# EAGLE board RTC-Module-Panel-v14 (EAGLE 6.5.0), part 1 of 2
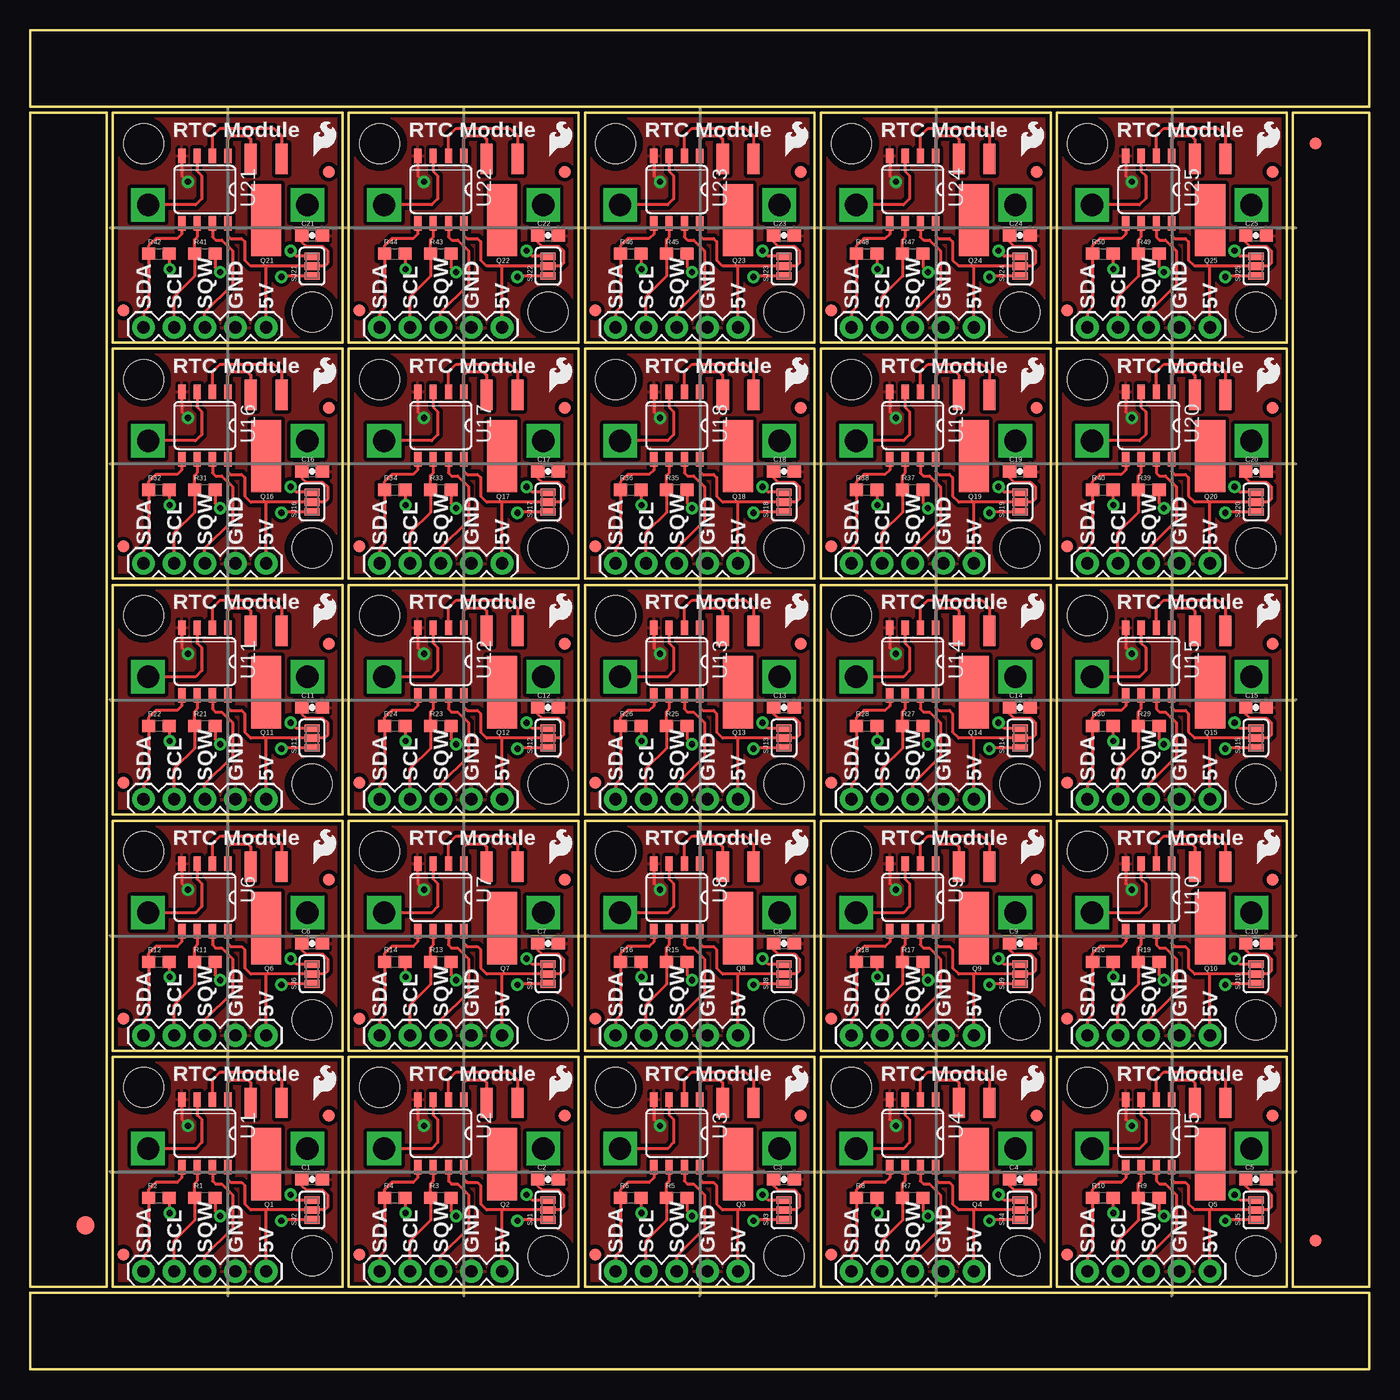
[diagram p0: board, top side]
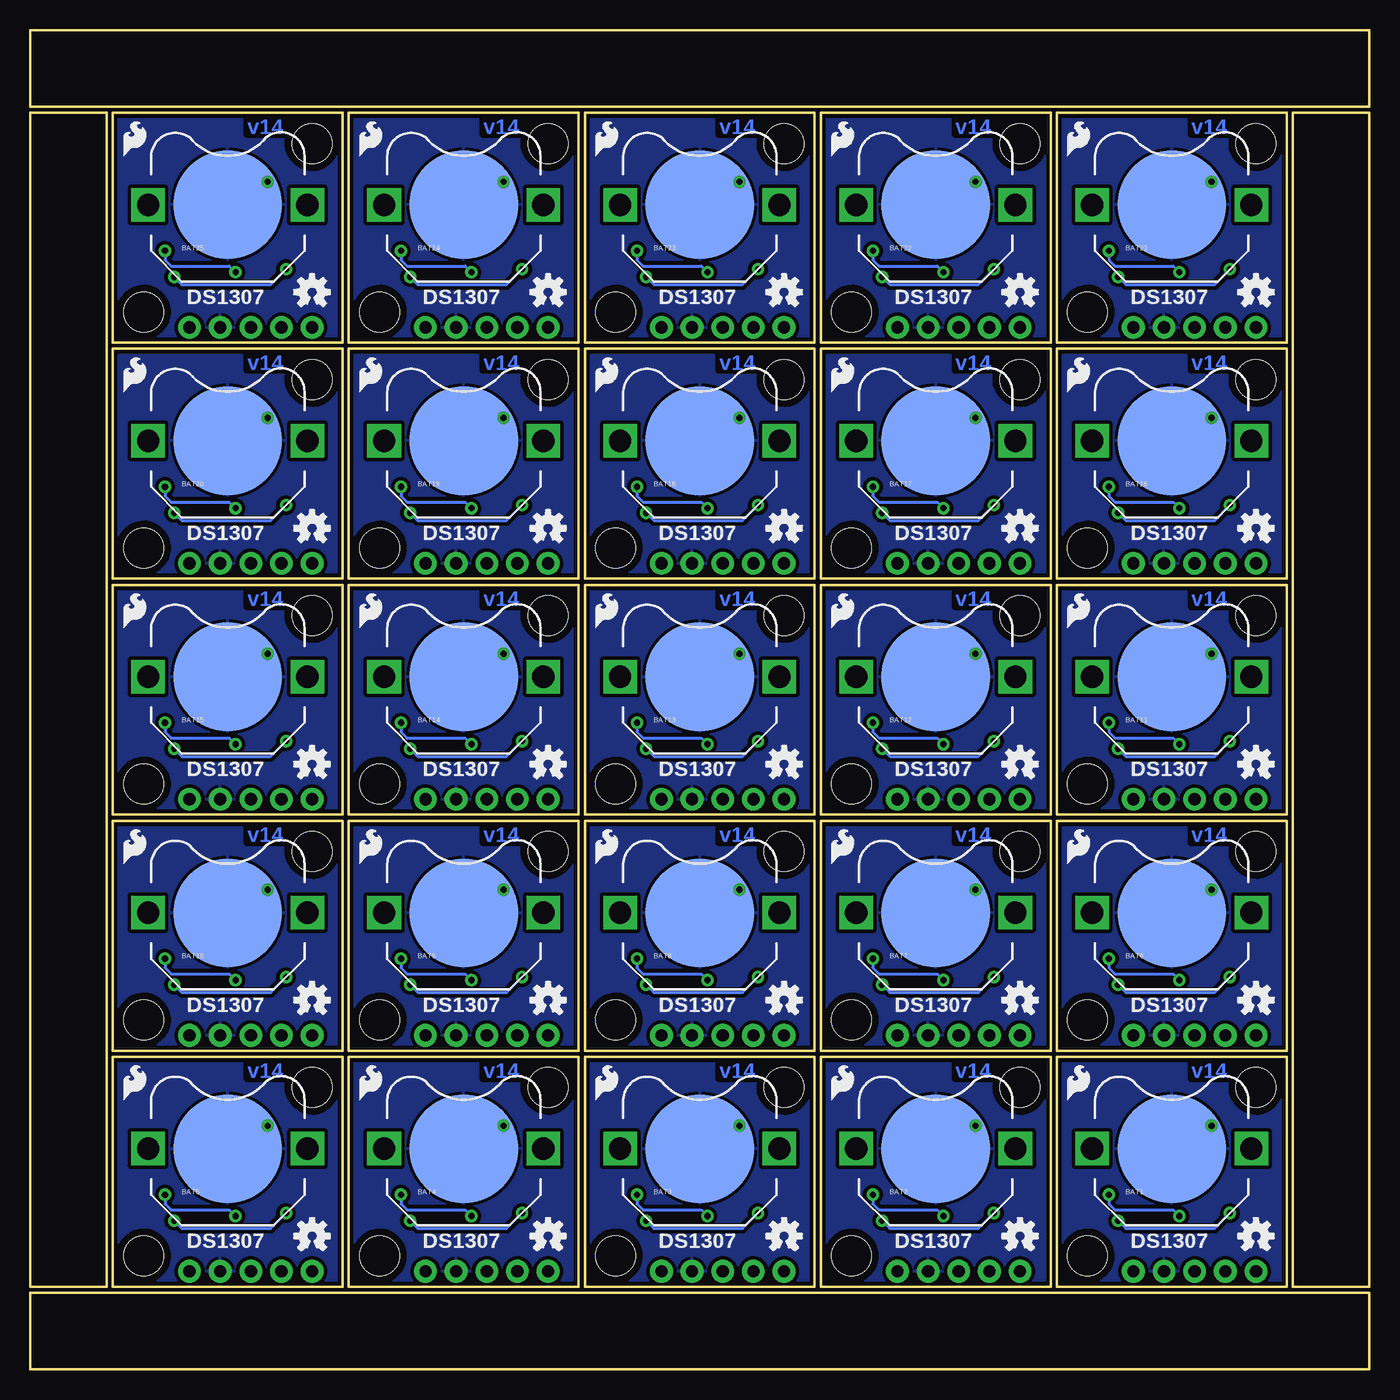
[diagram p1: board, bottom side, seen from below]

Size 111 x 111 mm. Coordinates in mm from the lower left corner, seen from the top.
Outline: 6.86,6.86 25.91,6.86 25.91,25.91 6.86,25.91 6.86,6.86
Outline: 26.42,6.86 45.47,6.86 45.47,25.91 26.42,25.91 26.42,6.86
Outline: 45.97,6.86 65.02,6.86 65.02,25.91 45.97,25.91 45.97,6.86
Outline: 65.53,6.86 84.58,6.86 84.58,25.91 65.53,25.91 65.53,6.86
Outline: 85.09,6.86 104.14,6.86 104.14,25.91 85.09,25.91 85.09,6.86
Outline: 6.86,26.42 25.91,26.42 25.91,45.47 6.86,45.47 6.86,26.42
Outline: 26.42,26.42 45.47,26.42 45.47,45.47 26.42,45.47 26.42,26.42
Outline: 45.97,26.42 65.02,26.42 65.02,45.47 45.97,45.47 45.97,26.42
Outline: 65.53,26.42 84.58,26.42 84.58,45.47 65.53,45.47 65.53,26.42
Outline: 85.09,26.42 104.14,26.42 104.14,45.47 85.09,45.47 85.09,26.42
Outline: 6.86,45.97 25.91,45.97 25.91,65.02 6.86,65.02 6.86,45.97
Outline: 26.42,45.97 45.47,45.97 45.47,65.02 26.42,65.02 26.42,45.97
Outline: 45.97,45.97 65.02,45.97 65.02,65.02 45.97,65.02 45.97,45.97
Outline: 65.53,45.97 84.58,45.97 84.58,65.02 65.53,65.02 65.53,45.97
Outline: 85.09,45.97 104.14,45.97 104.14,65.02 85.09,65.02 85.09,45.97
Outline: 6.86,65.53 25.91,65.53 25.91,84.58 6.86,84.58 6.86,65.53
Outline: 26.42,65.53 45.47,65.53 45.47,84.58 26.42,84.58 26.42,65.53
Outline: 45.97,65.53 65.02,65.53 65.02,84.58 45.97,84.58 45.97,65.53
Outline: 65.53,65.53 84.58,65.53 84.58,84.58 65.53,84.58 65.53,65.53
Outline: 85.09,65.53 104.14,65.53 104.14,84.58 85.09,84.58 85.09,65.53
Outline: 6.86,85.09 25.91,85.09 25.91,104.14 6.86,104.14 6.86,85.09
Outline: 26.42,85.09 45.47,85.09 45.47,104.14 26.42,104.14 26.42,85.09
Outline: 45.97,85.09 65.02,85.09 65.02,104.14 45.97,104.14 45.97,85.09
Outline: 65.53,85.09 84.58,85.09 84.58,104.14 65.53,104.14 65.53,85.09
Outline: 85.09,85.09 104.14,85.09 104.14,104.14 85.09,104.14 85.09,85.09
Outline: 6.35,6.86 6.35,104.14 0,104.14 0,6.86 6.35,6.86
Outline: 0,0 111,0 111,6.35 0,6.35 0,0
Outline: 111,6.86 111,104.14 104.65,104.14 104.65,6.86 111,6.86
Outline: 111,111 0,111 0,104.65 111,104.65 111,111
Copper layers (1*16): Top 0.035mm / dielectric 1.5mm / Bottom 0.035mm
Design rules "SparkFun-2-layer": minimum track width 7mil, minimum drill 15mil, track to track 8mil, track to pad 8mil, pad to pad 8mil, via to via 8mil, smd to smd 8mil, copper to edge 8mil, drill to drill 8mil, minimum pad ring 12mil, minimum via ring 10mil, stop-mask expansion 4mil, vias tented up to drill 20mil, thermal gap 10mil

## Footprints (pad centres in the part's own frame; a part is rotated, then mirrored left to right if it is on the bottom)
BATTCON_12MM_PTH = smd 9 x 9: GND 0,0 | drill 1.854 square: VCC@1 6.604,0; VCC@2 -6.604,0
0603-CAP = smd 1.1 x 1: 1 -0.85,0; 2 0.85,0
FIDUCIAL-1X2 = smd 1 x 1: 1 0,0
FIDUCIAL-1.5X3 = smd 1.5 x 1.5: 1 0,0
1X05 = drill 1.016 pad 1.88: 1 0,0; 2 2.54,0; 3 5.08,0; 4 7.62,0; 5 10.16,0
CRYSTAL-32KHZ-SMD = smd 2.5 x 6: SHEILD 0,5.08 | smd 1 x 2.5: X1 -1.27,0; X2 1.27,0
0603 = smd 1.1 x 1: 1 -0.85,0; 2 0.85,0
SJ_3_PASTE1&2&3 = smd 0.635 x 1.27: 1 -0.813,0; 2 0,0; 3 0.813,0
SO08-TIGHT = smd 0.6 x 1.2: 1 -1.905,-2.8; 2 -0.635,-2.8; 3 0.635,-2.8; 4 1.905,-2.8; 5 1.905,2.8; 6 0.635,2.8; 7 -0.635,2.8; 8 -1.905,2.8
STAND-OFF = hole 3.302: 0,0

## Placement (x,y rotation side)
BAT1  [BATTCON_12MM_PTH]  16.38,18.29 0 bottom
BAT2  [BATTCON_12MM_PTH]  35.94,18.29 0 bottom
BAT3  [BATTCON_12MM_PTH]  55.5,18.29 0 bottom
BAT4  [BATTCON_12MM_PTH]  75.06,18.29 0 bottom
BAT5  [BATTCON_12MM_PTH]  94.61,18.29 0 bottom
BAT6  [BATTCON_12MM_PTH]  16.38,37.85 0 bottom
BAT7  [BATTCON_12MM_PTH]  35.94,37.85 0 bottom
BAT8  [BATTCON_12MM_PTH]  55.5,37.85 0 bottom
BAT9  [BATTCON_12MM_PTH]  75.06,37.85 0 bottom
BAT10  [BATTCON_12MM_PTH]  94.61,37.85 0 bottom
BAT11  [BATTCON_12MM_PTH]  16.38,57.4 0 bottom
BAT12  [BATTCON_12MM_PTH]  35.94,57.4 0 bottom
BAT13  [BATTCON_12MM_PTH]  55.5,57.4 0 bottom
BAT14  [BATTCON_12MM_PTH]  75.06,57.4 0 bottom
BAT15  [BATTCON_12MM_PTH]  94.61,57.4 0 bottom
BAT16  [BATTCON_12MM_PTH]  16.38,76.96 0 bottom
BAT17  [BATTCON_12MM_PTH]  35.94,76.96 0 bottom
BAT18  [BATTCON_12MM_PTH]  55.5,76.96 0 bottom
BAT19  [BATTCON_12MM_PTH]  75.06,76.96 0 bottom
BAT20  [BATTCON_12MM_PTH]  94.61,76.96 0 bottom
BAT21  [BATTCON_12MM_PTH]  16.38,96.52 0 bottom
BAT22  [BATTCON_12MM_PTH]  35.94,96.52 0 bottom
BAT23  [BATTCON_12MM_PTH]  55.5,96.52 0 bottom
BAT24  [BATTCON_12MM_PTH]  75.06,96.52 0 bottom
BAT25  [BATTCON_12MM_PTH]  94.61,96.52 0 bottom
C1  0.1uF  [0603-CAP]  23.37,15.75 0 top
C2  0.1uF  [0603-CAP]  42.93,15.75 0 top
C3  0.1uF  [0603-CAP]  62.48,15.75 0 top
C4  0.1uF  [0603-CAP]  82.04,15.75 0 top
C5  0.1uF  [0603-CAP]  101.6,15.75 0 top
C6  0.1uF  [0603-CAP]  23.37,35.31 0 top
C7  0.1uF  [0603-CAP]  42.93,35.31 0 top
C8  0.1uF  [0603-CAP]  62.48,35.31 0 top
C9  0.1uF  [0603-CAP]  82.04,35.31 0 top
C10  0.1uF  [0603-CAP]  101.6,35.31 0 top
C11  0.1uF  [0603-CAP]  23.37,54.86 0 top
C12  0.1uF  [0603-CAP]  42.93,54.86 0 top
C13  0.1uF  [0603-CAP]  62.48,54.86 0 top
C14  0.1uF  [0603-CAP]  82.04,54.86 0 top
C15  0.1uF  [0603-CAP]  101.6,54.86 0 top
C16  0.1uF  [0603-CAP]  23.37,74.42 0 top
C17  0.1uF  [0603-CAP]  42.93,74.42 0 top
C18  0.1uF  [0603-CAP]  62.48,74.42 0 top
C19  0.1uF  [0603-CAP]  82.04,74.42 0 top
C20  0.1uF  [0603-CAP]  101.6,74.42 0 top
C21  0.1uF  [0603-CAP]  23.37,93.98 0 top
C22  0.1uF  [0603-CAP]  42.93,93.98 0 top
C23  0.1uF  [0603-CAP]  62.48,93.98 0 top
C24  0.1uF  [0603-CAP]  82.04,93.98 0 top
C25  0.1uF  [0603-CAP]  101.6,93.98 0 top
E$1  [FIDUCIAL-1X2]  7.72,9.53 0 top
E$2  [FIDUCIAL-1X2]  24.74,21.03 0 top
E$3  [FIDUCIAL-1X2]  27.28,9.53 0 top
E$4  [FIDUCIAL-1X2]  44.3,21.03 0 top
E$5  [FIDUCIAL-1X2]  46.84,9.53 0 top
E$6  [FIDUCIAL-1X2]  63.86,21.03 0 top
E$7  [FIDUCIAL-1X2]  66.4,9.53 0 top
E$8  [FIDUCIAL-1X2]  83.41,21.03 0 top
E$9  [FIDUCIAL-1X2]  85.95,9.53 0 top
E$10  [FIDUCIAL-1X2]  102.97,21.03 0 top
E$11  [FIDUCIAL-1X2]  7.72,29.08 0 top
E$12  [FIDUCIAL-1X2]  24.74,40.59 0 top
E$13  [FIDUCIAL-1X2]  27.28,29.08 0 top
E$14  [FIDUCIAL-1X2]  44.3,40.59 0 top
E$15  [FIDUCIAL-1X2]  46.84,29.08 0 top
E$16  [FIDUCIAL-1X2]  63.86,40.59 0 top
E$17  [FIDUCIAL-1X2]  66.4,29.08 0 top
E$18  [FIDUCIAL-1X2]  83.41,40.59 0 top
E$19  [FIDUCIAL-1X2]  85.95,29.08 0 top
E$20  [FIDUCIAL-1X2]  102.97,40.59 0 top
E$21  [FIDUCIAL-1X2]  7.72,48.64 0 top
E$22  [FIDUCIAL-1X2]  24.74,60.15 0 top
E$23  [FIDUCIAL-1X2]  27.28,48.64 0 top
E$24  [FIDUCIAL-1X2]  44.3,60.15 0 top
E$25  [FIDUCIAL-1X2]  46.84,48.64 0 top
E$26  [FIDUCIAL-1X2]  63.86,60.15 0 top
E$27  [FIDUCIAL-1X2]  66.4,48.64 0 top
E$28  [FIDUCIAL-1X2]  83.41,60.15 0 top
E$29  [FIDUCIAL-1X2]  85.95,48.64 0 top
E$30  [FIDUCIAL-1X2]  102.97,60.15 0 top
E$31  [FIDUCIAL-1X2]  7.72,68.2 0 top
E$32  [FIDUCIAL-1X2]  24.74,79.71 0 top
E$33  [FIDUCIAL-1X2]  27.28,68.2 0 top
E$34  [FIDUCIAL-1X2]  44.3,79.71 0 top
E$35  [FIDUCIAL-1X2]  46.84,68.2 0 top
E$36  [FIDUCIAL-1X2]  63.86,79.71 0 top
E$37  [FIDUCIAL-1X2]  66.4,68.2 0 top
E$38  [FIDUCIAL-1X2]  83.41,79.71 0 top
E$39  [FIDUCIAL-1X2]  85.95,68.2 0 top
E$40  [FIDUCIAL-1X2]  102.97,79.71 0 top
E$41  [FIDUCIAL-1X2]  7.72,87.76 0 top
E$42  [FIDUCIAL-1X2]  24.74,99.26 0 top
E$43  [FIDUCIAL-1X2]  27.28,87.76 0 top
E$44  [FIDUCIAL-1X2]  44.3,99.26 0 top
E$45  [FIDUCIAL-1X2]  46.84,87.76 0 top
E$46  [FIDUCIAL-1X2]  63.86,99.26 0 top
E$47  [FIDUCIAL-1X2]  66.4,87.76 0 top
E$48  [FIDUCIAL-1X2]  83.41,99.26 0 top
E$49  [FIDUCIAL-1X2]  85.95,87.76 0 top
E$50  [FIDUCIAL-1X2]  102.97,99.26 0 top
E$51  [FIDUCIAL-1.5X3]  4.57,11.94 0 top
E$54  [FIDUCIAL-1X2]  106.55,10.67 0 top
E$55  [FIDUCIAL-1X2]  106.55,101.6 180 top
JP1  [1X05]  19.56,8.13 180 top
JP2  [1X05]  39.12,8.13 180 top
JP3  [1X05]  58.67,8.13 180 top
JP4  [1X05]  78.23,8.13 180 top
JP5  [1X05]  97.79,8.13 180 top
JP6  [1X05]  19.56,27.69 180 top
JP7  [1X05]  39.12,27.69 180 top
JP8  [1X05]  58.67,27.69 180 top
JP9  [1X05]  78.23,27.69 180 top
JP10  [1X05]  97.79,27.69 180 top
JP11  [1X05]  19.56,47.24 180 top
JP12  [1X05]  39.12,47.24 180 top
JP13  [1X05]  58.67,47.24 180 top
JP14  [1X05]  78.23,47.24 180 top
JP15  [1X05]  97.79,47.24 180 top
JP16  [1X05]  19.56,66.8 180 top
JP17  [1X05]  39.12,66.8 180 top
JP18  [1X05]  58.67,66.8 180 top
JP19  [1X05]  78.23,66.8 180 top
JP20  [1X05]  97.79,66.8 180 top
JP21  [1X05]  19.56,86.36 180 top
JP22  [1X05]  39.12,86.36 180 top
JP23  [1X05]  58.67,86.36 180 top
JP24  [1X05]  78.23,86.36 180 top
JP25  [1X05]  97.79,86.36 180 top
LOGO1  OSHW-LOGOS  [OSHW-LOGO-S]  9.4,11.05 0 bottom
LOGO2  OSHW-LOGOS  [OSHW-LOGO-S]  28.96,11.05 0 bottom
LOGO3  OSHW-LOGOS  [OSHW-LOGO-S]  48.51,11.05 0 bottom
LOGO4  OSHW-LOGOS  [OSHW-LOGO-S]  68.07,11.05 0 bottom
LOGO5  OSHW-LOGOS  [OSHW-LOGO-S]  87.63,11.05 0 bottom
LOGO6  OSHW-LOGOS  [OSHW-LOGO-S]  9.4,30.61 0 bottom
LOGO7  OSHW-LOGOS  [OSHW-LOGO-S]  28.96,30.61 0 bottom
LOGO8  OSHW-LOGOS  [OSHW-LOGO-S]  48.51,30.61 0 bottom
LOGO9  OSHW-LOGOS  [OSHW-LOGO-S]  68.07,30.61 0 bottom
LOGO10  OSHW-LOGOS  [OSHW-LOGO-S]  87.63,30.61 0 bottom
LOGO11  OSHW-LOGOS  [OSHW-LOGO-S]  9.4,50.16 0 bottom
LOGO12  OSHW-LOGOS  [OSHW-LOGO-S]  28.96,50.16 0 bottom
LOGO13  OSHW-LOGOS  [OSHW-LOGO-S]  48.51,50.16 0 bottom
LOGO14  OSHW-LOGOS  [OSHW-LOGO-S]  68.07,50.16 0 bottom
LOGO15  OSHW-LOGOS  [OSHW-LOGO-S]  87.63,50.16 0 bottom
LOGO16  OSHW-LOGOS  [OSHW-LOGO-S]  9.4,69.72 0 bottom
LOGO17  OSHW-LOGOS  [OSHW-LOGO-S]  28.96,69.72 0 bottom
LOGO18  OSHW-LOGOS  [OSHW-LOGO-S]  48.51,69.72 0 bottom
LOGO19  OSHW-LOGOS  [OSHW-LOGO-S]  68.07,69.72 0 bottom
LOGO20  OSHW-LOGOS  [OSHW-LOGO-S]  87.63,69.72 0 bottom
LOGO21  OSHW-LOGOS  [OSHW-LOGO-S]  9.4,89.28 0 bottom
LOGO22  OSHW-LOGOS  [OSHW-LOGO-S]  28.96,89.28 0 bottom
LOGO23  OSHW-LOGOS  [OSHW-LOGO-S]  48.51,89.28 0 bottom
LOGO24  OSHW-LOGOS  [OSHW-LOGO-S]  68.07,89.28 0 bottom
LOGO25  OSHW-LOGOS  [OSHW-LOGO-S]  87.63,89.28 0 bottom
Q1  32.768kHz  [CRYSTAL-32KHZ-SMD]  19.56,22.1 180 top
Q2  32.768kHz  [CRYSTAL-32KHZ-SMD]  39.12,22.1 180 top
Q3  32.768kHz  [CRYSTAL-32KHZ-SMD]  58.67,22.1 180 top
Q4  32.768kHz  [CRYSTAL-32KHZ-SMD]  78.23,22.1 180 top
Q5  32.768kHz  [CRYSTAL-32KHZ-SMD]  97.79,22.1 180 top
Q6  32.768kHz  [CRYSTAL-32KHZ-SMD]  19.56,41.66 180 top
Q7  32.768kHz  [CRYSTAL-32KHZ-SMD]  39.12,41.66 180 top
Q8  32.768kHz  [CRYSTAL-32KHZ-SMD]  58.67,41.66 180 top
Q9  32.768kHz  [CRYSTAL-32KHZ-SMD]  78.23,41.66 180 top
Q10  32.768kHz  [CRYSTAL-32KHZ-SMD]  97.79,41.66 180 top
Q11  32.768kHz  [CRYSTAL-32KHZ-SMD]  19.56,61.21 180 top
Q12  32.768kHz  [CRYSTAL-32KHZ-SMD]  39.12,61.21 180 top
Q13  32.768kHz  [CRYSTAL-32KHZ-SMD]  58.67,61.21 180 top
Q14  32.768kHz  [CRYSTAL-32KHZ-SMD]  78.23,61.21 180 top
Q15  32.768kHz  [CRYSTAL-32KHZ-SMD]  97.79,61.21 180 top
Q16  32.768kHz  [CRYSTAL-32KHZ-SMD]  19.56,80.77 180 top
Q17  32.768kHz  [CRYSTAL-32KHZ-SMD]  39.12,80.77 180 top
Q18  32.768kHz  [CRYSTAL-32KHZ-SMD]  58.67,80.77 180 top
Q19  32.768kHz  [CRYSTAL-32KHZ-SMD]  78.23,80.77 180 top
Q20  32.768kHz  [CRYSTAL-32KHZ-SMD]  97.79,80.77 180 top
Q21  32.768kHz  [CRYSTAL-32KHZ-SMD]  19.56,100.33 180 top
Q22  32.768kHz  [CRYSTAL-32KHZ-SMD]  39.12,100.33 180 top
Q23  32.768kHz  [CRYSTAL-32KHZ-SMD]  58.67,100.33 180 top
Q24  32.768kHz  [CRYSTAL-32KHZ-SMD]  78.23,100.33 180 top
Q25  32.768kHz  [CRYSTAL-32KHZ-SMD]  97.79,100.33 180 top
R1  4.7k  [0603]  14.48,14.22 0 top
R2  4.7k  [0603]  10.67,14.22 0 top
R3  4.7k  [0603]  34.04,14.22 0 top
R4  4.7k  [0603]  30.23,14.22 0 top
R5  4.7k  [0603]  53.59,14.22 0 top
R6  4.7k  [0603]  49.78,14.22 0 top
R7  4.7k  [0603]  73.15,14.22 0 top
R8  4.7k  [0603]  69.34,14.22 0 top
R9  4.7k  [0603]  92.71,14.22 0 top
R10  4.7k  [0603]  88.9,14.22 0 top
R11  4.7k  [0603]  14.48,33.78 0 top
R12  4.7k  [0603]  10.67,33.78 0 top
R13  4.7k  [0603]  34.04,33.78 0 top
R14  4.7k  [0603]  30.23,33.78 0 top
R15  4.7k  [0603]  53.59,33.78 0 top
R16  4.7k  [0603]  49.78,33.78 0 top
R17  4.7k  [0603]  73.15,33.78 0 top
R18  4.7k  [0603]  69.34,33.78 0 top
R19  4.7k  [0603]  92.71,33.78 0 top
R20  4.7k  [0603]  88.9,33.78 0 top
R21  4.7k  [0603]  14.48,53.34 0 top
R22  4.7k  [0603]  10.67,53.34 0 top
R23  4.7k  [0603]  34.04,53.34 0 top
R24  4.7k  [0603]  30.23,53.34 0 top
R25  4.7k  [0603]  53.59,53.34 0 top
R26  4.7k  [0603]  49.78,53.34 0 top
R27  4.7k  [0603]  73.15,53.34 0 top
R28  4.7k  [0603]  69.34,53.34 0 top
R29  4.7k  [0603]  92.71,53.34 0 top
R30  4.7k  [0603]  88.9,53.34 0 top
R31  4.7k  [0603]  14.48,72.9 0 top
R32  4.7k  [0603]  10.67,72.9 0 top
R33  4.7k  [0603]  34.04,72.9 0 top
R34  4.7k  [0603]  30.23,72.9 0 top
R35  4.7k  [0603]  53.59,72.9 0 top
R36  4.7k  [0603]  49.78,72.9 0 top
R37  4.7k  [0603]  73.15,72.9 0 top
R38  4.7k  [0603]  69.34,72.9 0 top
R39  4.7k  [0603]  92.71,72.9 0 top
R40  4.7k  [0603]  88.9,72.9 0 top
R41  4.7k  [0603]  14.48,92.46 0 top
R42  4.7k  [0603]  10.67,92.46 0 top
R43  4.7k  [0603]  34.04,92.46 0 top
R44  4.7k  [0603]  30.23,92.46 0 top
R45  4.7k  [0603]  53.59,92.46 0 top
R46  4.7k  [0603]  49.78,92.46 0 top
R47  4.7k  [0603]  73.15,92.46 0 top
R48  4.7k  [0603]  69.34,92.46 0 top
R49  4.7k  [0603]  92.71,92.46 0 top
R50  4.7k  [0603]  88.9,92.46 0 top
SJ1  [SJ_3_PASTE1&2&3]  42.93,13.21 90 top
SJ2  [SJ_3_PASTE1&2&3]  23.37,13.21 90 top
SJ3  [SJ_3_PASTE1&2&3]  62.48,13.21 90 top
SJ4  [SJ_3_PASTE1&2&3]  82.04,13.21 90 top
SJ5  [SJ_3_PASTE1&2&3]  101.6,13.21 90 top
SJ6  [SJ_3_PASTE1&2&3]  23.37,32.77 90 top
SJ7  [SJ_3_PASTE1&2&3]  42.93,32.77 90 top
SJ8  [SJ_3_PASTE1&2&3]  62.48,32.77 90 top
SJ9  [SJ_3_PASTE1&2&3]  82.04,32.77 90 top
SJ10  [SJ_3_PASTE1&2&3]  101.6,32.77 90 top
SJ11  [SJ_3_PASTE1&2&3]  23.37,52.32 90 top
SJ12  [SJ_3_PASTE1&2&3]  42.93,52.32 90 top
SJ13  [SJ_3_PASTE1&2&3]  62.48,52.32 90 top
SJ14  [SJ_3_PASTE1&2&3]  82.04,52.32 90 top
SJ15  [SJ_3_PASTE1&2&3]  101.6,52.32 90 top
SJ16  [SJ_3_PASTE1&2&3]  23.37,71.88 90 top
SJ17  [SJ_3_PASTE1&2&3]  42.93,71.88 90 top
SJ18  [SJ_3_PASTE1&2&3]  62.48,71.88 90 top
SJ19  [SJ_3_PASTE1&2&3]  82.04,71.88 90 top
SJ20  [SJ_3_PASTE1&2&3]  101.6,71.88 90 top
SJ21  [SJ_3_PASTE1&2&3]  23.37,91.44 90 top
SJ22  [SJ_3_PASTE1&2&3]  42.93,91.44 90 top
SJ23  [SJ_3_PASTE1&2&3]  62.48,91.44 90 top
SJ24  [SJ_3_PASTE1&2&3]  82.04,91.44 90 top
SJ25  [SJ_3_PASTE1&2&3]  101.6,91.44 90 top
U1  DS1307  [SO08-TIGHT]  14.48,19.56 180 top
U2  DS1307  [SO08-TIGHT]  34.04,19.56 180 top
U3  DS1307  [SO08-TIGHT]  53.59,19.56 180 top
U4  DS1307  [SO08-TIGHT]  73.15,19.56 180 top
U5  DS1307  [SO08-TIGHT]  92.71,19.56 180 top
U6  DS1307  [SO08-TIGHT]  14.48,39.12 180 top
U7  DS1307  [SO08-TIGHT]  34.04,39.12 180 top
U8  DS1307  [SO08-TIGHT]  53.59,39.12 180 top
U9  DS1307  [SO08-TIGHT]  73.15,39.12 180 top
U10  DS1307  [SO08-TIGHT]  92.71,39.12 180 top
U11  DS1307  [SO08-TIGHT]  14.48,58.67 180 top
U12  DS1307  [SO08-TIGHT]  34.04,58.67 180 top
U13  DS1307  [SO08-TIGHT]  53.59,58.67 180 top
U14  DS1307  [SO08-TIGHT]  73.15,58.67 180 top
U15  DS1307  [SO08-TIGHT]  92.71,58.67 180 top
U16  DS1307  [SO08-TIGHT]  14.48,78.23 180 top
U17  DS1307  [SO08-TIGHT]  34.04,78.23 180 top
U18  DS1307  [SO08-TIGHT]  53.59,78.23 180 top
U19  DS1307  [SO08-TIGHT]  73.15,78.23 180 top
U20  DS1307  [SO08-TIGHT]  92.71,78.23 180 top
U21  DS1307  [SO08-TIGHT]  14.48,97.79 180 top
U22  DS1307  [SO08-TIGHT]  34.04,97.79 180 top
U23  DS1307  [SO08-TIGHT]  53.59,97.79 180 top
U24  DS1307  [SO08-TIGHT]  73.15,97.79 180 top
U25  DS1307  [SO08-TIGHT]  92.71,97.79 180 top
U$1  LOGO-SFESK  [SFE-LOGO-FLAME]  23.5,22.35 0 top
U$2  LOGO-SFESK  [SFE-LOGO-FLAME]  25.02,22.35 0 bottom
U$3  LOGO-SFESK  [SFE-LOGO-FLAME]  43.05,22.35 0 top
U$4  STAND-OFF  [STAND-OFF]  42.93,9.4 0 top
U$5  STAND-OFF  [STAND-OFF]  28.96,23.37 0 top
U$6  STAND-OFF  [STAND-OFF]  23.37,9.4 0 top
U$7  STAND-OFF  [STAND-OFF]  9.4,23.37 0 top
U$8  LOGO-SFESK  [SFE-LOGO-FLAME]  44.58,22.35 0 bottom
U$9  LOGO-SFESK  [SFE-LOGO-FLAME]  62.61,22.35 0 top
U$10  STAND-OFF  [STAND-OFF]  62.48,9.4 0 top
U$11  STAND-OFF  [STAND-OFF]  48.51,23.37 0 top
U$12  LOGO-SFESK  [SFE-LOGO-FLAME]  64.14,22.35 0 bottom
U$13  LOGO-SFESK  [SFE-LOGO-FLAME]  82.17,22.35 0 top
U$14  STAND-OFF  [STAND-OFF]  82.04,9.4 0 top
U$15  STAND-OFF  [STAND-OFF]  68.07,23.37 0 top
U$16  LOGO-SFESK  [SFE-LOGO-FLAME]  83.69,22.35 0 bottom
U$17  LOGO-SFESK  [SFE-LOGO-FLAME]  101.73,22.35 0 top
U$18  STAND-OFF  [STAND-OFF]  101.6,9.4 0 top
U$19  STAND-OFF  [STAND-OFF]  87.63,23.37 0 top
U$20  LOGO-SFESK  [SFE-LOGO-FLAME]  103.25,22.35 0 bottom
U$21  LOGO-SFESK  [SFE-LOGO-FLAME]  23.5,41.91 0 top
U$22  STAND-OFF  [STAND-OFF]  23.37,28.96 0 top
U$23  STAND-OFF  [STAND-OFF]  9.4,42.93 0 top
U$24  LOGO-SFESK  [SFE-LOGO-FLAME]  25.02,41.91 0 bottom
U$25  LOGO-SFESK  [SFE-LOGO-FLAME]  43.05,41.91 0 top
U$26  STAND-OFF  [STAND-OFF]  42.93,28.96 0 top
U$27  STAND-OFF  [STAND-OFF]  28.96,42.93 0 top
U$28  LOGO-SFESK  [SFE-LOGO-FLAME]  44.58,41.91 0 bottom
U$29  LOGO-SFESK  [SFE-LOGO-FLAME]  62.61,41.91 0 top
U$30  STAND-OFF  [STAND-OFF]  62.48,28.96 0 top
U$31  STAND-OFF  [STAND-OFF]  48.51,42.93 0 top
U$32  LOGO-SFESK  [SFE-LOGO-FLAME]  64.14,41.91 0 bottom
U$33  LOGO-SFESK  [SFE-LOGO-FLAME]  82.17,41.91 0 top
U$34  STAND-OFF  [STAND-OFF]  82.04,28.96 0 top
U$35  STAND-OFF  [STAND-OFF]  68.07,42.93 0 top
U$36  LOGO-SFESK  [SFE-LOGO-FLAME]  83.69,41.91 0 bottom
U$37  LOGO-SFESK  [SFE-LOGO-FLAME]  101.73,41.91 0 top
U$38  STAND-OFF  [STAND-OFF]  101.6,28.96 0 top
U$39  STAND-OFF  [STAND-OFF]  87.63,42.93 0 top
U$40  LOGO-SFESK  [SFE-LOGO-FLAME]  103.25,41.91 0 bottom
U$41  LOGO-SFESK  [SFE-LOGO-FLAME]  23.5,61.47 0 top
U$42  STAND-OFF  [STAND-OFF]  23.37,48.51 0 top
U$43  STAND-OFF  [STAND-OFF]  9.4,62.48 0 top
U$44  LOGO-SFESK  [SFE-LOGO-FLAME]  25.02,61.47 0 bottom
U$45  LOGO-SFESK  [SFE-LOGO-FLAME]  43.05,61.47 0 top
U$46  STAND-OFF  [STAND-OFF]  42.93,48.51 0 top
U$47  STAND-OFF  [STAND-OFF]  28.96,62.48 0 top
U$48  LOGO-SFESK  [SFE-LOGO-FLAME]  44.58,61.47 0 bottom
U$49  LOGO-SFESK  [SFE-LOGO-FLAME]  62.61,61.47 0 top
U$50  STAND-OFF  [STAND-OFF]  62.48,48.51 0 top
U$51  STAND-OFF  [STAND-OFF]  48.51,62.48 0 top
U$52  LOGO-SFESK  [SFE-LOGO-FLAME]  64.14,61.47 0 bottom
U$53  LOGO-SFESK  [SFE-LOGO-FLAME]  82.17,61.47 0 top
U$54  STAND-OFF  [STAND-OFF]  82.04,48.51 0 top
U$55  STAND-OFF  [STAND-OFF]  68.07,62.48 0 top
U$56  LOGO-SFESK  [SFE-LOGO-FLAME]  83.69,61.47 0 bottom
U$57  LOGO-SFESK  [SFE-LOGO-FLAME]  101.73,61.47 0 top
U$58  STAND-OFF  [STAND-OFF]  101.6,48.51 0 top
U$59  STAND-OFF  [STAND-OFF]  87.63,62.48 0 top
U$60  LOGO-SFESK  [SFE-LOGO-FLAME]  103.25,61.47 0 bottom
U$61  LOGO-SFESK  [SFE-LOGO-FLAME]  23.5,81.03 0 top
U$62  STAND-OFF  [STAND-OFF]  23.37,68.07 0 top
U$63  STAND-OFF  [STAND-OFF]  9.4,82.04 0 top
U$64  LOGO-SFESK  [SFE-LOGO-FLAME]  25.02,81.03 0 bottom
U$65  LOGO-SFESK  [SFE-LOGO-FLAME]  43.05,81.03 0 top
U$66  STAND-OFF  [STAND-OFF]  42.93,68.07 0 top
U$67  STAND-OFF  [STAND-OFF]  28.96,82.04 0 top
U$68  LOGO-SFESK  [SFE-LOGO-FLAME]  44.58,81.03 0 bottom
U$69  LOGO-SFESK  [SFE-LOGO-FLAME]  62.61,81.03 0 top
U$70  STAND-OFF  [STAND-OFF]  62.48,68.07 0 top
U$71  STAND-OFF  [STAND-OFF]  48.51,82.04 0 top
U$72  LOGO-SFESK  [SFE-LOGO-FLAME]  64.14,81.03 0 bottom
U$73  LOGO-SFESK  [SFE-LOGO-FLAME]  82.17,81.03 0 top
U$74  STAND-OFF  [STAND-OFF]  82.04,68.07 0 top
U$75  STAND-OFF  [STAND-OFF]  68.07,82.04 0 top
U$76  LOGO-SFESK  [SFE-LOGO-FLAME]  83.69,81.03 0 bottom
U$77  LOGO-SFESK  [SFE-LOGO-FLAME]  101.73,81.03 0 top
U$78  STAND-OFF  [STAND-OFF]  101.6,68.07 0 top
U$79  STAND-OFF  [STAND-OFF]  87.63,82.04 0 top
U$80  LOGO-SFESK  [SFE-LOGO-FLAME]  103.25,81.03 0 bottom
U$81  LOGO-SFESK  [SFE-LOGO-FLAME]  23.5,100.58 0 top
U$82  STAND-OFF  [STAND-OFF]  23.37,87.63 0 top
U$83  STAND-OFF  [STAND-OFF]  9.4,101.6 0 top
U$84  LOGO-SFESK  [SFE-LOGO-FLAME]  25.02,100.58 0 bottom
U$85  LOGO-SFESK  [SFE-LOGO-FLAME]  43.05,100.58 0 top
U$86  STAND-OFF  [STAND-OFF]  42.93,87.63 0 top
U$87  STAND-OFF  [STAND-OFF]  28.96,101.6 0 top
U$88  LOGO-SFESK  [SFE-LOGO-FLAME]  44.58,100.58 0 bottom
U$89  LOGO-SFESK  [SFE-LOGO-FLAME]  62.61,100.58 0 top
U$90  STAND-OFF  [STAND-OFF]  62.48,87.63 0 top
U$91  STAND-OFF  [STAND-OFF]  48.51,101.6 0 top
U$92  LOGO-SFESK  [SFE-LOGO-FLAME]  64.14,100.58 0 bottom
U$93  LOGO-SFESK  [SFE-LOGO-FLAME]  82.17,100.58 0 top
U$94  STAND-OFF  [STAND-OFF]  82.04,87.63 0 top
U$95  STAND-OFF  [STAND-OFF]  68.07,101.6 0 top
U$96  LOGO-SFESK  [SFE-LOGO-FLAME]  83.69,100.58 0 bottom
U$97  LOGO-SFESK  [SFE-LOGO-FLAME]  101.73,100.58 0 top
U$98  STAND-OFF  [STAND-OFF]  101.6,87.63 0 top
U$99  STAND-OFF  [STAND-OFF]  87.63,101.6 0 top
U$100  LOGO-SFESK  [SFE-LOGO-FLAME]  103.25,100.58 0 bottom

## Library data of the parts
BAT1-BAT25 = SparkFun-Electromechanical
C1-C25 = SparkFun-Capacitors; PROD_ID: CAP-00810
E$1-E$50 JP1-JP25 U$1-U$100 = SparkFun
E$51 E$54 E$55 LOGO1-LOGO25 = SparkFun-Aesthetics
Q1-Q25 U1-U25 = SparkFun-FreqCtrl
R1-R50 = SparkFun-Resistors; PROD_ID: RES-07857
SJ1-SJ25 = SparkFun-Passives

## Nets
5V: C1.1 JP1.1 SJ2.2 U1.8
5V1: C2.1 JP2.1 SJ1.2 U2.8
5V2: C3.1 JP3.1 SJ3.2 U3.8
5V3: C4.1 JP4.1 SJ4.2 U4.8
5V4: C5.1 JP5.1 SJ5.2 U5.8
5V5: C6.1 JP6.1 SJ6.2 U6.8
5V6: C7.1 JP7.1 SJ7.2 U7.8
5V7: C8.1 JP8.1 SJ8.2 U8.8
5V8: C9.1 JP9.1 SJ9.2 U9.8
5V9: C10.1 JP10.1 SJ10.2 U10.8
5V10: C11.1 JP11.1 SJ11.2 U11.8
5V11: C12.1 JP12.1 SJ12.2 U12.8
5V12: C13.1 JP13.1 SJ13.2 U13.8
5V13: C14.1 JP14.1 SJ14.2 U14.8
5V14: C15.1 JP15.1 SJ15.2 U15.8
5V15: C16.1 JP16.1 SJ16.2 U16.8
5V16: C17.1 JP17.1 SJ17.2 U17.8
5V17: C18.1 JP18.1 SJ18.2 U18.8
5V18: C19.1 JP19.1 SJ19.2 U19.8
5V19: C20.1 JP20.1 SJ20.2 U20.8
5V20: C21.1 JP21.1 SJ21.2 U21.8
5V21: C22.1 JP22.1 SJ22.2 U22.8
5V22: C23.1 JP23.1 SJ23.2 U23.8
5V23: C24.1 JP24.1 SJ24.2 U24.8
5V24: C25.1 JP25.1 SJ25.2 U25.8
GND: BAT1.GND C1.2 JP1.2 U1.4
GND1: BAT2.GND C2.2 JP2.2 U2.4
GND2: BAT3.GND C3.2 JP3.2 U3.4
GND3: BAT4.GND C4.2 JP4.2 U4.4
GND4: BAT5.GND C5.2 JP5.2 U5.4
GND5: BAT6.GND C6.2 JP6.2 U6.4
GND6: BAT7.GND C7.2 JP7.2 U7.4
GND7: BAT8.GND C8.2 JP8.2 U8.4
GND8: BAT9.GND C9.2 JP9.2 U9.4
GND9: BAT10.GND C10.2 JP10.2 U10.4
GND10: BAT11.GND C11.2 JP11.2 U11.4
GND11: BAT12.GND C12.2 JP12.2 U12.4
GND12: BAT13.GND C13.2 JP13.2 U13.4
GND13: BAT14.GND C14.2 JP14.2 U14.4
GND14: BAT15.GND C15.2 JP15.2 U15.4
GND15: BAT16.GND C16.2 JP16.2 U16.4
GND16: BAT17.GND C17.2 JP17.2 U17.4
GND17: BAT18.GND C18.2 JP18.2 U18.4
GND18: BAT19.GND C19.2 JP19.2 U19.4
GND19: BAT20.GND C20.2 JP20.2 U20.4
GND20: BAT21.GND C21.2 JP21.2 U21.4
GND21: BAT22.GND C22.2 JP22.2 U22.4
GND22: BAT23.GND C23.2 JP23.2 U23.4
GND23: BAT24.GND C24.2 JP24.2 U24.4
GND24: BAT25.GND C25.2 JP25.2 U25.4
N$1: Q1.X2 U1.1
N$2: Q1.X1 U1.2
N$3: Q2.X2 U2.1
N$4: BAT1.VCC@1 U1.3
N$5: R1.2 SJ2.3
N$6: R2.2 SJ2.1
N$7: Q2.X1 U2.2
N$8: BAT2.VCC@1 U2.3
N$9: R3.2 SJ1.3
N$10: R4.2 SJ1.1
N$11: Q3.X2 U3.1
N$12: Q3.X1 U3.2
N$13: BAT3.VCC@1 U3.3
N$14: R5.2 SJ3.3
N$15: R6.2 SJ3.1
N$16: Q4.X2 U4.1
N$17: Q4.X1 U4.2
N$18: BAT4.VCC@1 U4.3
N$19: R7.2 SJ4.3
N$20: R8.2 SJ4.1
N$21: Q5.X2 U5.1
N$22: Q5.X1 U5.2
N$23: BAT5.VCC@1 U5.3
N$24: R9.2 SJ5.3
N$25: R10.2 SJ5.1
N$26: Q6.X2 U6.1
N$27: Q6.X1 U6.2
N$28: BAT6.VCC@1 U6.3
N$29: R11.2 SJ6.3
N$30: R12.2 SJ6.1
N$31: Q7.X2 U7.1
N$32: Q7.X1 U7.2
N$33: BAT7.VCC@1 U7.3
N$34: R13.2 SJ7.3
N$35: R14.2 SJ7.1
N$36: Q8.X2 U8.1
N$37: Q8.X1 U8.2
N$38: BAT8.VCC@1 U8.3
N$39: R15.2 SJ8.3
N$40: R16.2 SJ8.1
N$41: Q9.X2 U9.1
N$42: Q9.X1 U9.2
N$43: BAT9.VCC@1 U9.3
N$44: R17.2 SJ9.3
N$45: R18.2 SJ9.1
N$46: Q10.X2 U10.1
N$47: Q10.X1 U10.2
N$48: BAT10.VCC@1 U10.3
N$49: R19.2 SJ10.3
N$50: R20.2 SJ10.1
N$51: Q11.X2 U11.1
N$52: Q11.X1 U11.2
N$53: BAT11.VCC@1 U11.3
N$54: R21.2 SJ11.3
N$55: R22.2 SJ11.1
N$56: Q12.X2 U12.1
N$57: Q12.X1 U12.2
N$58: BAT12.VCC@1 U12.3
N$59: R23.2 SJ12.3
N$60: R24.2 SJ12.1
N$61: Q13.X2 U13.1
N$62: Q13.X1 U13.2
N$63: BAT13.VCC@1 U13.3
N$64: R25.2 SJ13.3
N$65: R26.2 SJ13.1
N$66: Q14.X2 U14.1
N$67: Q14.X1 U14.2
N$68: BAT14.VCC@1 U14.3
N$69: R27.2 SJ14.3
N$70: R28.2 SJ14.1
N$71: Q15.X2 U15.1
N$72: Q15.X1 U15.2
N$73: BAT15.VCC@1 U15.3
N$74: R29.2 SJ15.3
N$75: R30.2 SJ15.1
N$76: Q16.X2 U16.1
N$77: Q16.X1 U16.2
N$78: BAT16.VCC@1 U16.3
N$79: R31.2 SJ16.3
N$80: R32.2 SJ16.1
N$81: Q17.X2 U17.1
N$82: Q17.X1 U17.2
N$83: BAT17.VCC@1 U17.3
N$84: R33.2 SJ17.3
N$85: R34.2 SJ17.1
N$86: Q18.X2 U18.1
N$87: Q18.X1 U18.2
N$88: BAT18.VCC@1 U18.3
N$89: R35.2 SJ18.3
N$90: R36.2 SJ18.1
N$91: Q19.X2 U19.1
N$92: Q19.X1 U19.2
N$93: BAT19.VCC@1 U19.3
N$94: R37.2 SJ19.3
N$95: R38.2 SJ19.1
N$96: Q20.X2 U20.1
N$97: Q20.X1 U20.2
N$98: BAT20.VCC@1 U20.3
N$99: R39.2 SJ20.3
N$100: R40.2 SJ20.1
N$101: Q21.X2 U21.1
N$102: Q21.X1 U21.2
N$103: BAT21.VCC@1 U21.3
N$104: R41.2 SJ21.3
N$105: R42.2 SJ21.1
N$106: Q22.X2 U22.1
N$107: Q22.X1 U22.2
N$108: BAT22.VCC@1 U22.3
N$109: R43.2 SJ22.3
N$110: R44.2 SJ22.1
N$111: Q23.X2 U23.1
N$112: Q23.X1 U23.2
N$113: BAT23.VCC@1 U23.3
N$114: R45.2 SJ23.3
N$115: R46.2 SJ23.1
N$116: Q24.X2 U24.1
N$117: Q24.X1 U24.2
N$118: BAT24.VCC@1 U24.3
N$119: R47.2 SJ24.3
N$120: R48.2 SJ24.1
N$121: Q25.X2 U25.1
N$122: Q25.X1 U25.2
N$123: BAT25.VCC@1 U25.3
N$124: R49.2 SJ25.3
N$125: R50.2 SJ25.1
SCL: JP1.4 R1.1 U1.6
SCL1: JP2.4 R3.1 U2.6
SCL2: JP3.4 R5.1 U3.6
SCL3: JP4.4 R7.1 U4.6
SCL4: JP5.4 R9.1 U5.6
SCL5: JP6.4 R11.1 U6.6
SCL6: JP7.4 R13.1 U7.6
SCL7: JP8.4 R15.1 U8.6
SCL8: JP9.4 R17.1 U9.6
SCL9: JP10.4 R19.1 U10.6
SCL10: JP11.4 R21.1 U11.6
SCL11: JP12.4 R23.1 U12.6
SCL12: JP13.4 R25.1 U13.6
SCL13: JP14.4 R27.1 U14.6
SCL14: JP15.4 R29.1 U15.6
SCL15: JP16.4 R31.1 U16.6
SCL16: JP17.4 R33.1 U17.6
SCL17: JP18.4 R35.1 U18.6
SCL18: JP19.4 R37.1 U19.6
SCL19: JP20.4 R39.1 U20.6
SCL20: JP21.4 R41.1 U21.6
SCL21: JP22.4 R43.1 U22.6
SCL22: JP23.4 R45.1 U23.6
SCL23: JP24.4 R47.1 U24.6
SCL24: JP25.4 R49.1 U25.6
SDA: JP1.5 R2.1 U1.5
SDA1: JP2.5 R4.1 U2.5
SDA2: JP3.5 R6.1 U3.5
SDA3: JP4.5 R8.1 U4.5
SDA4: JP5.5 R10.1 U5.5
SDA5: JP6.5 R12.1 U6.5
SDA6: JP7.5 R14.1 U7.5
SDA7: JP8.5 R16.1 U8.5
SDA8: JP9.5 R18.1 U9.5
SDA9: JP10.5 R20.1 U10.5
SDA10: JP11.5 R22.1 U11.5
SDA11: JP12.5 R24.1 U12.5
SDA12: JP13.5 R26.1 U13.5
SDA13: JP14.5 R28.1 U14.5
SDA14: JP15.5 R30.1 U15.5
SDA15: JP16.5 R32.1 U16.5
SDA16: JP17.5 R34.1 U17.5
SDA17: JP18.5 R36.1 U18.5
SDA18: JP19.5 R38.1 U19.5
SDA19: JP20.5 R40.1 U20.5
SDA20: JP21.5 R42.1 U21.5
SDA21: JP22.5 R44.1 U22.5
SDA22: JP23.5 R46.1 U23.5
SDA23: JP24.5 R48.1 U24.5
SDA24: JP25.5 R50.1 U25.5
SQW: JP1.3 U1.7
SQW1: JP2.3 U2.7
SQW2: JP3.3 U3.7
SQW3: JP4.3 U4.7
SQW4: JP5.3 U5.7
SQW5: JP6.3 U6.7
SQW6: JP7.3 U7.7
SQW7: JP8.3 U8.7
SQW8: JP9.3 U9.7
SQW9: JP10.3 U10.7
SQW10: JP11.3 U11.7
SQW11: JP12.3 U12.7
SQW12: JP13.3 U13.7
SQW13: JP14.3 U14.7
SQW14: JP15.3 U15.7
SQW15: JP16.3 U16.7
SQW16: JP17.3 U17.7
SQW17: JP18.3 U18.7
SQW18: JP19.3 U19.7
SQW19: JP20.3 U20.7
SQW20: JP21.3 U21.7
SQW21: JP22.3 U22.7
SQW22: JP23.3 U23.7
SQW23: JP24.3 U24.7
SQW24: JP25.3 U25.7